# Altium PCB Motherboard.PcbDoc (part 5 of 5)
Units mm, origin at the board's own origin, x right, y up, seen from the top; angles counter-clockwise.
Board outline 133.86 x 67.84 mm, 4 copper layers (Top Layer, Power Plane, Ground Plane, Bottom Layer), stack 1.586 mm thick; 260 components, 155 nets, 877 pads, 1037 vias.
Unrouted connection lines stored in the file: 43.
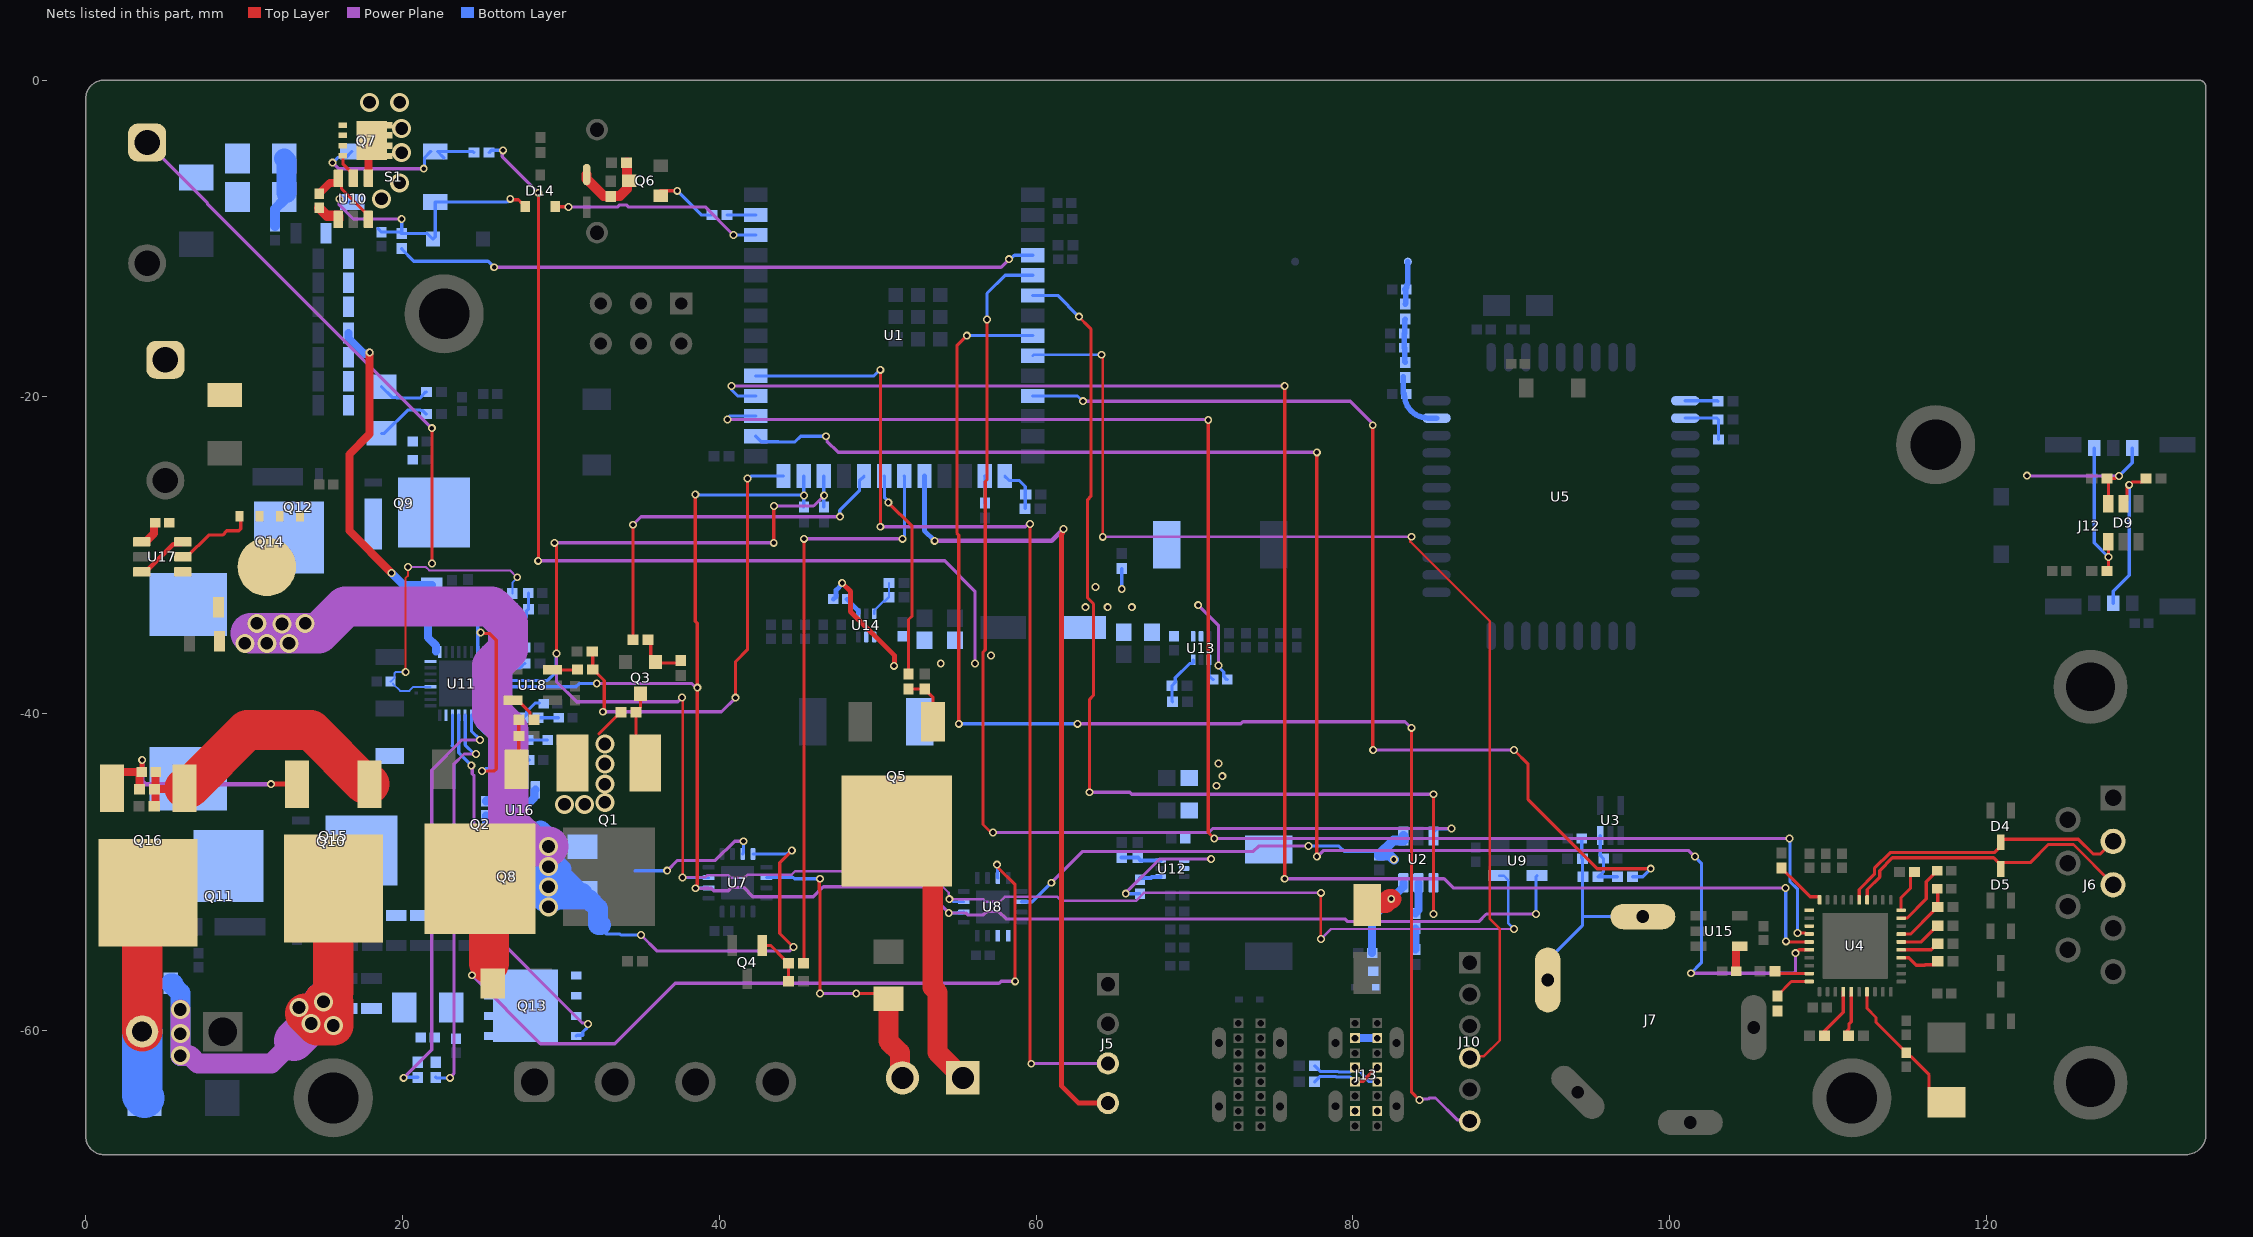
[diagram p5: the nets of this part, all layers, seen from the top]

## Via types
v1: diameter 0.5, hole 0.3, Top Layer to Bottom Layer, tented both sides, 988 vias
v2: diameter 1.2, hole 0.8, Top Layer to Bottom Layer, tented both sides, 29 vias
v3: diameter 0.5, hole 0.2, Top Layer to Bottom Layer, 20 vias

## Nets (pads, with @x,y where several pads share a name; then routed paths per layer and width w, separated by ;. In a path a pad name is that pad's centre, name@x,y a point inside that pad or via, vN(x,y) a via of type N, cw(c..) or ccw(c..) an arc to the next point about the centre after c; other vN are vias at no path point) (continued)
NetC8_2: C8.2 R32.2 U4.7 | length 4.2
  Top Layer w0.203: U4.7@114.613,-53.91 115.218,-53.91 116.68,-52.448 116.68,-52.423 116.903,-52.2 R32.2@116.928,-52.2 116.928,-51.077 C8.2@116.908,-51.057
NetC9_2: C9.2 U4.9 | length 4.2
  Top Layer w0.203: U4.9@114.613,-52.91 114.626,-52.897 114.997,-52.897 116.205,-51.689 116.205,-50.597 116.888,-49.914 C9.2@116.908,-49.914
NetC10_2: C10.2 U4.37 Y1.2 | length 9.2
  Top Layer w0.203: U4.37@112.463,-57.56 112.463,-58.615 113.03,-59.182 113.03,-59.484 114.935,-61.389 C10.2@114.935,-61.409 114.935,-61.429 115.143,-61.637 115.211,-61.637 116.377,-62.803 116.377,-63.686 117.225,-64.534 Y1.2@117.475,-64.534
NetC17_2: C17.2 R39.2 U5.32 | length 4
  Bottom Layer w0.35: R39.2@83.185,-18.73 83.185,-19.753 ccw(c83.244,-19.753) 83.244,-19.812 ccw(c84.77,-19.812) 84.77,-21.338 U5.32@85.279,-21.338
NetC18_2: C18.2 C19.2 R39.1 R40.2 | length 2.8
  Bottom Layer w0.35: R39.1@83.312,-17.813 83.278,-17.779 83.278,-16.925 C18.2@83.244,-16.891 C19.2@83.244,-16.002 83.278,-15.968 83.278,-15.114 R40.2@83.312,-15.08
NetC20_2: C20.2 R40.1 RF_PCB1.1 | length 2.8
  Bottom Layer w0.35: R40.1@83.312,-14.13 83.341,-14.101 83.341,-13.285 83.264,-13.208 83.399,-13.073 83.399,-12.938 83.469,-12.868 RF_PCB1.1@83.469,-11.46
NetC23_2: C23.2 J7.3 J7.5 R44.1 R45.1 | length 13.7
  Bottom Layer w0.203: J7.5@92.306,-56.809 92.306,-55.559 94.489,-53.376 94.489,-52.706 ; C23.2@94.454,-47.879 94.454,-49.114 R45.1@94.489,-49.149 94.489,-52.706 ; J7.3@98.306,-52.809 94.592,-52.809 94.489,-52.706
NetC27_2: C27.2 C28.2 Q9.5-6-7-8 R48.1 R54.2 | length 3.5
  Bottom Layer w0.203: R48.1@18.669,-22.303 18.844,-22.303 20.319,-20.828 21.129,-20.828 21.159,-20.859 21.273,-20.859 R54.2@21.496,-21.082
NetC40_2: C40.2 R50.2 R51.2 | length 4.3
  Bottom Layer w0.635: C40.2@11.938,-9.199 11.938,-8.127 12.524,-7.541 R50.2@12.524,-7.366
  Bottom Layer w1.27: R51.2@12.524,-4.953 12.664,-5.093 R50.2@12.664,-7.125
NetC43_1: C43.1 U10.1 | length 1.6
  Top Layer w0.635: C43.1@14.732,-8.06 14.732,-8.065 14.74,-8.073 14.745,-8.073 15.232,-8.56 15.923,-8.56 15.941,-8.578 U10.1@15.941,-8.793
NetC43_2: C43.2 D11.2 J11.1 Q7.1 Q7.2 Q7.3 R50.1 R51.1 U10.3 U10.6 | length 39.2
  Top Layer w0.203: U10.6@15.941,-6.193 16.139,-6.391 16.139,-6.841 17.841,-8.543 U10.3@17.841,-8.793 ; v1(21.844,-21.971) 21.851,-21.978 21.851,-30.502 v1(21.859,-30.509)
  Top Layer w0.508: C43.2@14.732,-7.18 14.732,-7.16 15.403,-6.489 15.895,-6.489 15.941,-6.443 U10.6@15.941,-6.193
  Power Plane w0.203: J11.1@3.868,-3.937 7.678,-7.747 7.678,-7.805 v1(21.844,-21.971)
NetC56_2: C56.2 C57.2 Q13.5 Q13.6 Q13.7 Q13.8 Q13.9 R59.2 R61.2
NetC57_1: C57.1 C58.1 C59.1 Q15.2 R57.1 R59.1 R62.2 | length 29.8
  Top Layer w2.54: v2@13.843,-58.928 14.605,-59.69 v2(15.621,-59.69) 15.621,-58.225 15.586,-58.19 v2(15.01,-58.19) ; 15.621,-57.578 Q15.2@15.621,-51.041
  Power Plane w1.27: v2(5.969,-58.674) v2(5.969,-60.198) v2(5.969,-61.595) 6.582,-61.595 7.07,-62.083 11.704,-62.083 13.144,-60.642
  Power Plane w2.54: 13.144,-60.642 v2(14.224,-59.563) 15.01,-58.777 v2(15.01,-58.19)
  Bottom Layer w1.27: R57.1@5.36,-57.023 5.505,-57.023 5.545,-57.063 5.545,-57.208 5.969,-57.632 v2(5.969,-58.674) v2(5.969,-60.198) v2(5.969,-61.595)
  other v2: 13.462,-58.547
NetC60_2: C60.2 R66.1 | length 1.2
  Bottom Layer w0.203: R66.1@27.907,-41.656 C60.2@29.151,-41.656
NetC62_2: C62.2 R66.2 U11.17 | length 4
  Bottom Layer w0.203: 25.273,-40.259 25.535,-40.259 26.932,-41.656 26.982,-41.656 27.205,-41.879 27.354,-42.028 27.354,-42.065 27.473,-42.184 27.51,-42.184 27.798,-42.472 27.798,-42.718 28.006,-42.926 C62.2@28.008,-42.926
NetC63_1: C63.1 R68.1 U11.8 | length 5.3
  Bottom Layer w0.203: U11.8@25.149,-36.1 25.149,-35.828 26.289,-34.688 27.034,-34.688 27.81,-33.912 27.81,-33.531 27.942,-33.399 C63.1@27.942,-32.385
NetC65_1: C65.1 R71.1 U11.16 | length 3.8
  Bottom Layer w0.203: U11.16@25.749,-39.5 26.021,-39.5 26.022,-39.502 26.022,-39.689 26.592,-40.259 R71.1@27.592,-40.259 ; R71.1@27.617,-40.259 27.84,-40.036 27.84,-39.859 28.375,-39.324 C65.1@28.621,-39.324
NetC66_1: C66.1 U11.9 | length 2.4
  Bottom Layer w0.203: U11.9@25.749,-36.7 26.435,-36.7 27.113,-36.022 27.546,-36.022 C66.1@27.754,-35.814
NetC67_1: C67.1 R71.2 | length 1.3
  Bottom Layer w0.203: R71.2@28.542,-40.259 C67.1@29.845,-40.259
NetC68_1: C68.1 L2.1 U12.2 | length 7.2
  Power Plane w0.203: v1(65.659,-51.363) 65.659,-51.308 67.795,-49.172 v1(71.049,-49.172)
  Bottom Layer w0.203: v1(65.659,-51.363) 66.544,-51.363 C68.1@66.548,-51.367
NetC68_2: C68.2 U12.4 | length 1.3
  Bottom Layer w0.254: C68.2@66.548,-50.36 67.239,-50.36 67.3,-50.299 67.839,-50.299 U12.4@67.862,-50.276
NetC77_2: C77.2 D14.1 D15.2 R75.2 S1.3 S1.4 | length 19
  Top Layer w0.203: v1(26.797,-7.493) 26.854,-7.55 27.317,-7.55 27.504,-7.737 27.554,-7.737 27.752,-7.935 D14.1@27.752,-7.985
  Power Plane w0.203: v1(16.002,-7.493) 16.002,-7.874 16.891,-8.763 v1(19.939,-8.763)
  Bottom Layer w0.203: v1(16.002,-7.493) 16.17,-7.493 16.253,-7.411 16.538,-7.696 S1.4@16.806,-7.696 S1.4@17.081,-7.696 ; C77.2@18.461,-9.385 C77.2@18.669,-9.593 19.847,-9.593 R75.2@19.939,-9.685 ; v1(19.939,-8.763) R75.2@19.939,-9.685 ; v1(26.797,-7.493) 26.594,-7.696 23.622,-7.696 S1.3@22.056,-7.696 22.056,-9.897 D15.2@21.92,-10.033 21.572,-9.685 R75.2@19.939,-9.685
NetC78_1: C78.1 L3.1 U13.2 | length 5.5
  Power Plane w0.203: v1(70.231,-33.147) 71.519,-34.435 71.519,-36.95 v1(71.51,-36.958)
  Bottom Layer w0.203: v1(71.51,-36.958) 71.51,-37.039 71.84,-37.368 71.84,-37.638 72.048,-37.846 C78.1@72.068,-37.846
NetC78_2: C78.2 U13.4 | length 1.4
  Bottom Layer w0.203: U13.4@70.915,-36.601 70.915,-37.593 71.168,-37.846 C78.2@71.188,-37.846
NetC87_1: C87.1 L4.1 U14.2 | length 7.9
  Top Layer w0.3: v1(47.752,-31.75) 48.279,-32.277 48.279,-33.547 51.054,-36.322 51.054,-36.957 51.049,-36.957 v1(51.027,-36.979)
  Bottom Layer w0.3: C87.1@47.185,-32.766 47.205,-32.766 47.365,-32.606 47.365,-32.191 47.752,-31.804 v1(47.752,-31.75)
NetC87_2: C87.2 U14.4 | length 1.2
  Bottom Layer w0.3: C87.2@48.065,-32.766 48.085,-32.766 48.245,-32.926 48.245,-32.961 48.776,-33.492 U14.4@48.776,-33.677
NetC97_2: C97.2 U15.4 | length 1.8
  Top Layer w0.508: C97.2@104.199,-56.261 104.199,-54.717 104.245,-54.671 U15.4@104.424,-54.671
NetC99_2: C99.2 R44.2 R83.1 U3.3 | length 4.1
  Bottom Layer w0.203: R44.2@95.471,-50.292 R44.2@95.496,-50.292 ; U3.3@95.616,-47.686 95.616,-48.941 95.824,-49.149 C99.2@95.826,-49.149 95.826,-49.962 R44.2@95.496,-50.292 ; R83.1@96.713,-50.292 R44.2@95.496,-50.292
NetC100_1: C100.1 U16.1 | length 1.7
  Bottom Layer w0.508: C100.1@25.273,-45.534 25.273,-45.514 25.329,-45.458 25.825,-45.458 26.186,-45.097 26.436,-45.097 26.482,-45.051 U16.1@26.482,-44.801
NetC103_1: C103.1 U17.1 | length 1.7
  Top Layer w0.508: U17.1@3.526,-29.149 3.776,-29.149 4.31,-28.615 4.31,-27.996 4.366,-27.94 C103.1@4.386,-27.94
NetC103_2: C103.2 D10.2 J8.1 Q14.1 Q14.2 Q14.3 U17.3 U17.6 | length 3.4
  Top Layer w0.305: U17.3@3.526,-31.049 3.776,-31.049 5.528,-29.297 5.978,-29.297 U17.6@6.126,-29.149
NetC106_1: C106.1 Q15.3 Q16.3 R58.1 | length 15.7
  Top Layer w0.305: C106.1@3.51,-43.688 3.543,-43.655 3.543,-42.939 v1(3.556,-42.926) ; v1(11.684,-44.45) 11.693,-44.441 Q15.3@13.335,-44.441
  Top Layer w0.508: Q16.3@1.651,-44.695 1.651,-44.184 2.147,-43.688 3.51,-43.688 3.396,-43.802 R58.1@3.396,-44.761
  Power Plane w0.305: v1(3.556,-42.926) 3.556,-44.271 3.735,-44.45 v1(11.684,-44.45)
NetC106_2: C106.2 Q15.1 Q16.1 R58.2 R63.2 | length 18.7
  Top Layer w0.508: R63.2@4.318,-45.847 4.339,-45.847 4.41,-45.776 R58.2@4.41,-44.761 ; R58.2@4.346,-44.761 R58.2@4.41,-44.761 ; C106.2@4.41,-43.688 R58.2@4.41,-44.761 ; Q16.1@6.223,-44.695 6.157,-44.761 R58.2@4.41,-44.761
  Top Layer w2.54: Q16.1@6.223,-44.695 6.513,-44.695 10.187,-41.021 14.197,-41.021 17.617,-44.441 Q15.1@17.907,-44.441
NetD13_1: D13.1 J9.2 Q16.2 R57.2 | length 16.4
  Top Layer w2.54: J9.2@3.556,-60.071 3.556,-51.676 Q16.2@3.937,-51.295
  Bottom Layer w1.27: J9.2@3.556,-60.071 3.683,-59.944 3.683,-57.063 3.723,-57.023 R57.2@3.81,-57.023
  Bottom Layer w2.54: J9.2@3.556,-60.071 3.556,-64.109 D13.1@3.709,-64.262
NetD14_2: D14.2 U1.38 | length 13.5
  Top Layer w0.203: D14.2@29.652,-7.985 30.464,-7.985 v1(30.48,-8.001)
  Power Plane w0.203: v1(30.48,-8.001) 33.577,-8.001 33.7,-7.878 34.118,-7.878 34.241,-8.001 39.116,-8.001 v1(40.894,-9.779)
  Bottom Layer w0.203: v1(40.894,-9.779) U1.38@42.291,-9.779
NetD16_2: D16.2 Q6.3 R34.2 R35.2 | length 5.2
  Top Layer w0.635: D16.2@31.623,-5.96 31.623,-6.24 32.683,-7.3 33.139,-7.3 R34.2@33.147,-7.308 ; R34.2@33.147,-7.333 R34.2@33.147,-7.308 ; R35.2@34.13,-5.207 34.155,-5.207 34.163,-5.215 34.163,-6.393 34.163,-6.858 33.721,-7.3 33.154,-7.3 R34.2@33.147,-7.308
NetJ5_3: J5.3 U1.31 | length 66.4
  Top Layer w0.203: v1(50.165,-28.194) v1(50.165,-18.288) ; v1(59.619,-28.019) 59.619,-59.69 59.619,-62.032 v1(59.69,-62.103)
  Power Plane w0.203: v1(50.165,-28.194) 59.309,-28.194 59.484,-28.019 v1(59.619,-28.019) ; v1(59.69,-62.103) 59.7,-62.093 64.523,-62.093 J5.3@64.533,-62.083
  Bottom Layer w0.203: U1.31@42.291,-18.669 49.761,-18.669 50.142,-18.288 v1(50.165,-18.288)
NetJ5_4: J5.4 U1.19 | length 51.4
  Top Layer w0.3: v1(61.722,-28.343) 61.684,-28.381 61.684,-28.613 61.595,-28.702 61.595,-63.5 62.678,-64.583 J5.4@64.533,-64.583
  Power Plane w0.3: v1(53.594,-29.083) 60.982,-29.083 v1(61.722,-28.343)
  Bottom Layer w0.3: U1.19@52.946,-24.999 52.946,-28.435 v1(53.594,-29.083)
NetJ10_4: J10.4 U1.9 | length 72
  Top Layer w0.152: v1(64.125,-17.338) 64.201,-17.338 64.262,-17.399 64.204,-17.457 v1(64.204,-28.834) ; v1(83.693,-28.829) 83.629,-28.893 83.629,-29.146 88.646,-34.163 88.646,-52.959 89.281,-53.594 89.281,-60.619 88.28,-61.62 87.478,-61.62 J10.4@87.376,-61.722
  Power Plane w0.152: v1(64.204,-28.834) 64.199,-28.829 v1(83.693,-28.829)
  Bottom Layer w0.152: U1.9@59.791,-17.399 59.852,-17.338 v1(64.125,-17.338)
NetJ10_6: J10.6 U1.8 | length 85.3
  Top Layer w0.203: v1(55.118,-40.64) 55.118,-28.721 54.995,-28.598 54.995,-16.76 v1(55.626,-16.129) ; v1(83.693,-40.894) 83.693,-63.881 v1(84.201,-64.389)
  Power Plane w0.203: v1(62.611,-40.64) 72.927,-40.64 73.054,-40.513 83.289,-40.513 83.67,-40.894 v1(83.693,-40.894) ; v1(84.201,-64.389) 84.258,-64.332 84.745,-64.332 84.815,-64.262 85.217,-64.262 86.614,-65.659 87.313,-65.659 J10.6@87.376,-65.722
  Bottom Layer w0.203: v1(55.118,-40.64) v1(62.611,-40.64) ; v1(55.626,-16.129) U1.8@59.791,-16.129
NetQ1_1: Q1.1 Q3.3 R8.2 | length 4.8
  Top Layer w0.2: Q3.3@35.02,-38.69 35.02,-39.612 34.983,-39.649 34.983,-39.674 34.758,-39.899 R8.2@34.733,-39.899 34.733,-42.521 Q1.1@35.31,-43.098
NetQ2_1: Q2.1 R11.2 R16.1 | length 3.2
  Top Layer w0.2: Q2.1@27.192,-43.519 27.338,-43.373 R11.2@27.338,-41.402 R16.1@27.338,-40.386
NetQ2_4: Q2.4 R46.2 U8.11 | length 58.2
  Top Layer w0.203: v1(24.384,-56.515) 24.776,-56.515 25.449,-55.842 25.449,-55.753 ; Q2.4@24.892,-50.419 Q2.4@28.263,-47.048 ; v1(57.531,-49.53) 57.531,-49.657 58.674,-50.8 v1(58.674,-56.896)
  Top Layer w2.54: Q2.4@24.892,-50.419 25.449,-50.976 25.449,-55.753
  Power Plane w0.203: v1(24.384,-56.515) 28.702,-60.833 33.401,-60.833 37.211,-57.023 57.658,-57.023 57.785,-56.896 v1(58.674,-56.896)
  Bottom Layer w0.203: v1(57.531,-49.53) 57.557,-49.556 57.557,-50.346 U8.11@57.583,-50.372
NetQ3_1: Q3.1 R10.1 R12.2 | length 3.5
  Top Layer w0.2: R10.1@35.495,-35.327 35.67,-35.503 35.67,-36.79 37.4,-36.79 R12.2@37.56,-36.63
NetQ4_1: Q4.1 R14.2 R15.2 | length 3.3
  Top Layer w0.203: Q4.1@42.699,-54.637 43.24,-54.637 44.108,-55.505 44.108,-55.53 44.356,-55.778 R15.2@44.356,-56.896
NetQ5_1: Q5.1 R22.2 R23.2 | length 3.3
  Top Layer w0.203: R22.2@51.943,-38.448 R23.2@52.959,-38.448 52.959,-38.473 53.182,-38.696 53.207,-38.696 53.495,-38.984 Q5.1@53.495,-40.513
NetQ6_1: Q6.1 R47.2 | length 3.9
  Top Layer w0.203: Q6.1@36.256,-7 36.271,-6.985 v1(37.338,-6.985)
  Bottom Layer w0.203: v1(37.338,-6.985) 38.862,-8.509 R47.2@39.53,-8.509
NetQ7_4: Q7.4 U10.5 | length 1.7
  Top Layer w0.203: Q7.4@16.228,-4.785 16.228,-5.28 16.891,-5.943 U10.5@16.891,-6.193
NetQ8_4: Q8.4 U16.5 | length 3.3
  Bottom Layer w0.203: Q8.4@25.114,-49.317 25.214,-49.317 25.814,-48.717 26.366,-48.717 27.432,-47.651 U16.5@27.432,-47.401
NetQ13_4: Q13.4 U11.21 | length 24.3
  Power Plane w0.203: v1(24.341,-43.264) 24.397,-43.32 24.397,-43.806 24.511,-43.92 24.511,-52.705 31.335,-59.529 31.565,-59.529 31.624,-59.588 v1(31.704,-59.588)
  Bottom Layer w0.203: U11.21@23.549,-40.1 23.549,-42.472 v1(24.341,-43.264) ; Q13.4@30.969,-60.346 31.013,-60.302 31.373,-60.302 31.373,-60.094 31.648,-59.819 31.648,-59.645 v1(31.704,-59.588)
NetQ14_4: Q14.4 U17.5 | length 5.2
  Top Layer w0.203: U17.5@6.126,-30.099 6.376,-30.099 7.755,-28.72 8.631,-28.72 8.903,-28.448 9.66,-28.448 9.779,-28.329 9.779,-27.61 Q14.4@9.705,-27.536
NetR3_2: R3.2 R9.1 U1.26 | length 29.4
  Top Layer w0.203: R3.2@31.971,-36.068 32.004,-36.101 R9.1@32.004,-37.211 32.029,-37.211 32.439,-37.621 32.456,-37.621 32.737,-37.902 32.737,-39.7 32.639,-39.798 v1(32.639,-39.878) ; v1(41.021,-38.989) 41.021,-36.703 41.783,-35.941 v1(41.783,-25.146)
  Power Plane w0.203: v1(32.639,-39.878) 40.132,-39.878 v1(41.021,-38.989)
  Bottom Layer w0.203: v1(41.783,-25.146) 41.863,-25.146 42.01,-24.999 U1.26@44.056,-24.999
NetR4_2: R4.2 U1.16 | length 1.7
  Bottom Layer w0.203: U1.16@56.756,-24.999 56.769,-25.012 R4.2@56.769,-26.703
NetR7_1: R7.1 R64.1 U11.18 | length 3.8
  Bottom Layer w0.203: U11.18@24.749,-40.1 24.749,-40.751 25.781,-41.783 R64.1@25.781,-42.324 25.781,-42.349 26.01,-42.578 R7.1@26.797,-42.578
NetR9_2: R9.2 U18.3 | length 1.6
  Top Layer w0.203: U18.3@29.467,-37.239 31.026,-37.239 R9.2@31.054,-37.211
NetR10_2: R10.2 U1.22 | length 23.8
  Top Layer w0.2: v1(34.544,-28.067) 34.545,-28.068 R10.2@34.545,-35.327
  Power Plane w0.2: v1(34.544,-28.067) 35.052,-27.559 v1(47.619,-27.559)
  Bottom Layer w0.2: v1(47.619,-27.559) 47.6,-27.54 47.6,-27.162 48.838,-25.925 48.838,-25.297 U1.22@49.136,-24.999
NetR14_1: R14.1 U1.20 | length 37
  Top Layer w0.203: R14.1@45.306,-55.753 45.339,-55.72 v1(45.339,-28.956)
  Power Plane w0.203: v1(45.339,-28.956) v1(51.562,-28.956)
  Bottom Layer w0.203: v1(51.562,-28.956) 51.562,-28.876 51.689,-28.749 51.689,-25.012 U1.20@51.676,-24.999
NetR16_2: R16.2 U18.5 | length 2
  Top Layer w0.203: U18.5@26.967,-39.139 27.267,-39.139 28.04,-39.912 28.04,-40.163 28.263,-40.386 R16.2@28.288,-40.386
NetR19_2: R19.2 U2.1 U8.14 | length 27.5
  Power Plane w0.203: v1(60.96,-50.673) 62.94,-48.693 73.71,-48.693 74.045,-48.358 v1(77.191,-48.358)
  Bottom Layer w0.203: U8.14@59.083,-51.872 59.761,-51.872 v1(60.96,-50.673) ; v1(77.191,-48.358) 79.124,-48.358 79.446,-48.68 81.438,-48.68 81.661,-48.903 R19.2@81.661,-48.928
  Bottom Layer w0.635: R19.2@81.661,-48.928 81.661,-48.953 81.669,-48.961 82.348,-48.961 v1(82.585,-49.198) ; R19.2@81.661,-48.903 82.558,-48.006 83.177,-48.006 83.185,-47.998 U2.1@83.185,-47.723
NetR20_1: R20.1 R21.2 | length 1.3
  Bottom Layer w0.5: R21.2@83.947,-54.897 R20.1@83.947,-53.561
NetR20_2: R20.2 U2.5 | length 2
  Bottom Layer w0.5: R20.2@83.947,-52.611 83.947,-52.586 84.135,-52.398 U2.5@84.135,-50.673
NetR22_1: R22.1 U1.21 | length 13.3
  Top Layer w0.203: v1(50.669,-26.67) 52.168,-28.169 52.168,-33.829 51.943,-34.054 R22.1@51.943,-37.498
  Bottom Layer w0.2: U1.21@50.406,-24.999 50.419,-25.012 50.419,-26.339 50.669,-26.589 v1(50.669,-26.67)
NetR24_1: R24.1 U4.20 | length 3.3
  Top Layer w0.203: R24.1@107.061,-49.751 108.077,-50.767 108.872,-51.562 109.45,-51.562 109.463,-51.575 U4.20@109.463,-51.76
NetR25_1: R25.1 U4.29 | length 2.2
  Top Layer w0.203: R25.1@106.65,-56.264 106.796,-56.41 U4.29@108.813,-56.41
NetR26_2: R26.2 U4.35 | length 2.7
  Top Layer w0.203: R26.2@111.128,-60.107 111.319,-59.916 111.319,-59.599 111.463,-59.455 U4.35@111.463,-57.56
NetR27_2: R27.2 U4.34 | length 3.1
  Top Layer w0.203: R27.2@109.731,-60.107 109.731,-60.082 110.963,-58.85 U4.34@110.963,-57.56
NetR28_2: R28.2 U4.4 | length 2.6
  Top Layer w0.203: U4.4@114.613,-55.41 115.1,-55.41 115.57,-55.88 116.109,-55.88 116.14,-55.849 116.705,-55.849 R28.2@116.928,-55.626
NetR29_2: R29.2 U4.5 | length 2.5
  Top Layer w0.203: U4.5@114.613,-54.91 116.526,-54.91 116.903,-54.533 R29.2@116.928,-54.533
NetR30_2: R30.2 U4.6 | length 2.7
  Top Layer w0.203: U4.6@114.613,-54.41 115.883,-54.41 116.903,-53.39 R30.2@116.928,-53.39
NetR31_2: R31.2 U4.10 | length 2.8
  Top Layer w0.203: U4.10@114.613,-52.41 114.613,-51.602 115.209,-51.006 115.209,-50.211 115.432,-49.988 R31.2@115.457,-49.988
NetR33_1: R33.1 U4.30 | length 2.4
  Top Layer w0.203: R33.1@106.807,-57.818 106.807,-57.793 107.69,-56.91 U4.30@108.813,-56.91
NetR33_2: R33.2
NetR36_1: R36.1 U5.1 | length 2.1
  Bottom Layer w0.2: U5.1@100.979,-20.238 103.018,-20.238 R36.1@103.059,-20.279
NetR37_2: R37.2 R38.1 U5.2 | length 3.4
  Bottom Layer w0.2: U5.2@100.979,-21.338 102.975,-21.338 R37.2@103.059,-21.422 103.092,-21.455 R38.1@103.092,-22.692
NetR47_1: R47.1 U1.39 | length 1.8
  Bottom Layer w0.203: R47.1@40.48,-8.509 U1.39@42.291,-8.509
NetR60_1: R60.1 U11.1 | length 3
  Bottom Layer w0.508: R60.1@21.844,-33.414 21.786,-33.414 21.59,-33.61 21.59,-35.179 22.098,-35.687 22.098,-36.068
NetR61_1: R61.1 U11.20 | length 25.3
  Power Plane w0.203: v1(22.987,-62.992) 22.987,-62.979 23.241,-62.725 23.241,-43.18 23.876,-42.545 v1(24.638,-42.545)
  Bottom Layer w0.203: R61.1@22.098,-62.959 22.131,-62.992 v1(22.987,-62.992) ; U11.20@23.949,-40.1 23.949,-41.983 24.511,-42.545 v1(24.638,-42.545)
NetR62_1: R62.1 U11.19 | length 26.7
  Power Plane w0.203: v1(20.066,-62.992) 21.844,-61.214 21.844,-43.561 23.749,-41.656 v1(24.892,-41.656)
  Bottom Layer w0.203: v1(20.066,-62.992) 20.099,-62.959 R62.1@20.955,-62.959 ; U11.19@24.349,-40.1 24.349,-41.113 v1(24.892,-41.656)
NetR70_1: R70.1 U11.10 | length 2.1
  Bottom Layer w0.203: U11.10@25.749,-37.1 27.424,-37.1 27.694,-36.83 R70.1@27.719,-36.83
NetR72_2: R72.2 S1.1 S1.2 | length 11.6
  Power Plane w0.203: v1(15.577,-5.206) 15.958,-5.588 v1(21.336,-5.588)
  Bottom Layer w0.203: v1(15.577,-5.206) 15.897,-4.886 16.416,-4.886 S1.2@16.806,-4.496 ; v1(21.336,-5.588) 21.383,-5.541 21.383,-4.894 S1.1@21.781,-4.496 ; S1.1@22.596,-4.894 22.203,-4.501 24.44,-4.501 R72.2@24.511,-4.572
NetR74_1: R74.1 R76.2 U12.6 | length 2.5
  Bottom Layer w0.254: R74.1@65.405,-49.086 R76.2@66.421,-49.086 66.587,-49.253 67.839,-49.253 U12.6@67.862,-49.276
NetR75_1: R75.1 U1.4 | length 40.7
  Power Plane w0.203: v1(25.781,-11.811) 57.785,-11.811 v1(58.293,-11.303)
  Bottom Layer w0.203: R75.1@19.939,-10.635 19.939,-10.66 20.709,-11.43 25.4,-11.43 v1(25.781,-11.811) ; v1(58.293,-11.303) 58.373,-11.303 58.627,-11.049 U1.4@59.791,-11.049
NetR77_1: R77.1 R78.2 U13.6 | length 3.3
  Bottom Layer w0.203: R78.2@68.613,-39.243 68.58,-39.21 R77.1@68.58,-38.227 68.785,-38.022 68.785,-37.732 69.682,-36.834 69.867,-36.834 69.915,-36.786 U13.6@69.915,-36.601
NetR79_1: R79.1 R80.2 U14.6 | length 2.4
  Bottom Layer w0.15: U14.6@49.776,-33.677 49.776,-33.492 50.379,-32.889 50.456,-32.889 R80.2@50.706,-32.639 R79.1@50.706,-31.75
NetR81_1: R81.1 R82.1 U1.15 | length 3
  Bottom Layer w0.203: U1.15@58.026,-24.999 58.3,-25.273 58.928,-25.273 59.309,-25.654 R82.1@59.309,-27.051
NetR83_2: R83.2 U1.11 | length 66.2
  Top Layer w0.203: v1(81.254,-21.789) 81.254,-42.265 v1(81.28,-42.291) ; v1(90.17,-42.291) 91.059,-43.18 91.059,-45.424 95.419,-49.784 v1(98.806,-49.784)
  Power Plane w0.203: v1(62.955,-20.266) 79.829,-20.266 81.28,-21.717 81.28,-21.763 v1(81.254,-21.789) ; v1(81.28,-42.291) v1(90.17,-42.291)
  Bottom Layer w0.203: U1.11@59.791,-19.939 62.611,-19.939 62.992,-20.32 62.992,-20.303 v1(62.955,-20.266) ; R83.2@97.663,-50.292 98.298,-50.292 v1(98.806,-49.784)
NetU1_5: U1.5 U2.3 | length 68.4
  Top Layer w0.203: v1(56.896,-15.113) 56.896,-25.228 56.786,-25.338 56.786,-35.973 56.646,-36.113 56.646,-46.994 57.15,-47.498 v1(57.277,-47.498)
  Power Plane w0.203: v1(57.277,-47.498) 70.915,-47.498 71.169,-47.244 v1(86.233,-47.244)
  Bottom Layer w0.203: v1(56.896,-15.113) 56.896,-13.462 58.039,-12.319 U1.5@59.791,-12.319 ; U2.3@85.085,-47.723 85.085,-47.482 85.308,-47.259 86.218,-47.259 v1(86.233,-47.244)
NetU1_6: U1.6 U2.4 | length 65.7
  Top Layer w0.203: v1(62.701,-14.931) 62.628,-14.859 62.611,-14.859 63.459,-15.707 63.459,-26.27 63.25,-26.479 63.25,-32.692 63.623,-33.065 63.623,-38.846 63.373,-39.096 v1(63.373,-44.958) ; v1(85.09,-52.646) v1(85.09,-45.085)
  Power Plane w0.203: v1(63.373,-44.958) 65.913,-44.958 66.04,-45.085 v1(85.09,-45.085)
  Bottom Layer w0.203: U1.6@59.791,-13.589 61.358,-13.589 v1(62.701,-14.931) ; U2.4@85.085,-50.673 85.087,-50.675 85.087,-52.644 v1(85.09,-52.646)
NetU4_21: U4.21
NetU4_23: U4.23
NetU8_1: U8.1
NetU8_2: U8.2
PHOTOTHERAPY+: J4.2 R17.2 U7.14 | length 20.5
  Top Layer w0.203: v1(46.355,-57.658) 46.355,-51.181 46.312,-51.138 46.312,-50.462 v1(46.355,-50.419) ; v1(48.641,-57.658) 50.341,-57.658 R17.2@50.673,-57.99
  Top Layer w1.27: R17.2@50.673,-57.99 50.673,-60.67 51.403,-61.4 51.403,-62.833 J4.2@51.562,-62.992
  Power Plane w0.203: v1(46.355,-57.658) v1(48.641,-57.658)
  Bottom Layer w0.203: U7.14@42.973,-50.348 44.672,-50.348 44.743,-50.419 v1(46.355,-50.419)
PHOTOTHERAPY-: J4.1 Q5.4 | length 17.3
  Top Layer w1.27: Q5.4@51.195,-47.413 53.471,-49.689 53.471,-57.288 53.78,-57.597 53.78,-61.4 J4.1@55.372,-62.992
REGN: C55.2 R65.2 U11.28 | length 19
  Top Layer w0.127: v1(20.192,-37.36) 20.192,-31.428 20.345,-31.274 v1(20.345,-30.738)
  Power Plane w0.127: v1(20.345,-30.738) 21.465,-30.738 21.677,-30.95 26.779,-30.95 27.214,-31.385 v1(27.237,-31.385)
  Bottom Layer w0.127: C55.2@19.236,-37.973 19.256,-37.973 19.503,-37.727 19.503,-37.435 19.577,-37.36 v1(20.192,-37.36) ; C55.2@19.383,-38.1 19.838,-38.555 20.426,-38.555 20.681,-38.3 U11.28@21.749,-38.3 ; R65.2@26.924,-32.418 26.924,-31.718 27.237,-31.405 v1(27.237,-31.385)
SCL: R5.2 U1.25 U7.6 U8.6 U9.3 U11.13 | length 106.1
  Top Layer w0.203: v1(38.481,-26.162) 38.481,-34.163 38.608,-34.29 v1(38.608,-38.354) 38.608,-50.8 38.481,-50.927 38.481,-51.008 v1(38.494,-51.022)
  Power Plane w0.203: v1(32.258,-38.1) 38.274,-38.1 38.528,-38.354 v1(38.608,-38.354) ; v1(38.494,-51.022) 39.488,-51.022 39.643,-51.177 40.557,-51.177 40.765,-50.969 41.531,-50.969 42.12,-51.558 45.935,-51.558 46.566,-50.927 52.832,-50.927 v1(54.483,-52.578) 55.554,-52.578 55.677,-52.701 56.667,-52.701 56.875,-52.493 57.641,-52.493 58.103,-52.955 79.498,-52.955 79.668,-53.125 87.95,-53.125 88.429,-52.646 v1(91.567,-52.646)
  Bottom Layer w0.203: U11.13@25.749,-38.3 25.751,-38.302 30.942,-38.302 31.144,-38.1 v1(32.258,-38.1) ; v1(38.481,-26.162) 38.51,-26.191 45.315,-26.191 v1(45.345,-26.22) ; v1(38.494,-51.022) 38.506,-51.01 39.311,-51.01 U7.6@39.323,-50.998 ; U1.25@45.326,-24.999 45.326,-26.22 45.326,-26.944 R5.2@45.339,-26.957 ; v1(54.483,-52.578) 55.038,-52.578 55.045,-52.57 55.385,-52.57 U8.6@55.433,-52.522 ; v1(91.567,-52.646) 91.567,-50.283 U9.3@91.624,-50.226
SDA: R6.2 U1.24 U7.7 U8.7 U9.4 U11.12 | length 119.7
  Top Layer w0.152: v1(37.636,-38.974) 37.678,-39.016 v1(37.678,-50.336) ; v1(77.978,-54.229) v1(77.978,-51.308)
  Top Layer w0.203: v1(29.591,-29.21) 29.591,-29.29 29.718,-29.417 v1(29.718,-36.195) ; v1(43.434,-29.21) 43.434,-26.895 v1(43.442,-26.887)
  Power Plane w0.152: v1(37.678,-50.336) 39.088,-50.336 39.23,-50.194 40.546,-50.194 40.703,-50.352 41.593,-50.352 41.779,-50.165 44.564,-50.165 44.788,-49.94 53.115,-49.94 54.483,-51.308 54.483,-51.689 54.501,-51.689 v1(54.522,-51.71) 56.648,-51.71 56.814,-51.876 57.703,-51.876 58.016,-51.562 61.341,-51.562 61.595,-51.816 66.294,-51.816 66.802,-51.308 v1(77.978,-51.308) ; v1(77.978,-54.229) 78.613,-53.594 v1(90.17,-53.594)
  Power Plane w0.203: v1(29.591,-29.21) v1(43.434,-29.21) ; v1(29.718,-36.195) 29.718,-37.973 30.988,-39.243 37.367,-39.243 v1(37.636,-38.974) ; v1(43.442,-26.887) 45.948,-26.887 v1(46.615,-26.22)
  Bottom Layer w0.152: v1(37.678,-50.336) 37.678,-50.333 37.719,-50.292 37.775,-50.348 U7.7@39.323,-50.348 ; v1(54.522,-51.71) 54.616,-51.71 54.778,-51.872 U8.7@55.433,-51.872 ; U9.4@89.224,-50.226 89.524,-50.226 89.798,-50.5 89.798,-53.222 v1(90.17,-53.594)
  Bottom Layer w0.203: U11.12@25.749,-37.9 29.156,-37.9 29.688,-37.368 29.688,-36.225 v1(29.718,-36.195) ; U1.24@46.596,-24.999 46.596,-26.944 R6.2@46.609,-26.957
SIM_CLK: D9.6 J12.S3 R42.1 | length 10.5
  Top Layer w0.203: D9.6@127.701,-26.74 127.701,-25.245 R42.1@127.602,-25.146 128.143,-25.146 128.291,-24.998 v1(128.366,-24.998)
  Power Plane w0.203: v1(122.557,-24.97) 122.555,-24.972 122.555,-25.019 122.576,-24.998 v1(128.366,-24.998)
  Bottom Layer w0.203: v1(128.366,-24.998) 129.212,-24.152 J12.S3@129.212,-23.221
SIM_DATA: D9.1 J12.S6 R41.1 | length 9.1
  Top Layer w0.203: R41.1@127.602,-30.988 127.701,-30.889 v1(127.701,-30.104) D9.1@127.701,-29.14
  Bottom Layer w0.203: J12.S6@126.812,-23.221 126.812,-29.215 v1(127.701,-30.104)
SIM_RST: D9.5 J12.S2 R43.1 | length 10.5
  Top Layer w0.203: D9.5@128.651,-26.74 128.874,-26.517 128.874,-25.685 v1(129.013,-25.546) 129.19,-25.369 129.858,-25.369 R43.1@130.081,-25.146
  Bottom Layer w0.203: J12.S2@128.012,-33.021 128.012,-32.262 129.013,-31.261 v1(129.013,-25.546)
SPI_MISO: U1.30 U4.25 | length 104.7
  Top Layer w0.203: v1(75.692,-50.419) v1(75.692,-19.304) ; v1(107.339,-54.37) 107.379,-54.41 U4.25@108.813,-54.41
  Power Plane w0.203: v1(40.767,-19.304) v1(75.692,-19.304) ; v1(75.692,-50.419) 85.756,-50.419 86.337,-50.999 v1(107.315,-50.999)
  Bottom Layer w0.203: v1(40.767,-19.304) 40.767,-19.558 41.148,-19.939 U1.30@42.291,-19.939 ; v1(107.315,-50.999) 107.327,-51.011 107.327,-54.358 v1(107.339,-54.37)
SPI_MOSI: U1.28 U4.26 | length 102.6
  Top Layer w0.203: v1(77.724,-49.022) v1(77.724,-23.495) ; v1(107.95,-55.118) 108.158,-54.91 U4.26@108.813,-54.91
  Power Plane w0.203: v1(46.736,-22.479) 46.793,-22.536 46.793,-22.79 47.498,-23.495 v1(77.724,-23.495) ; v1(77.724,-49.022) 77.737,-49.022 78.118,-48.641 101.206,-48.641 101.587,-49.022 v1(101.6,-49.022) ; v1(101.346,-56.388) 107.831,-56.388 107.95,-56.269 v1(107.95,-55.118)
  Bottom Layer w0.203: U1.28@42.291,-22.479 42.639,-22.827 43.732,-22.827 43.749,-22.844 44.769,-22.844 45.134,-22.479 v1(46.736,-22.479) ; v1(101.346,-56.388) 102.007,-55.727 102.007,-49.442 101.6,-49.035 v1(101.6,-49.022)
SPI_SCK: U1.29 U4.24 | length 102.3
  Top Layer w0.203: v1(70.866,-21.463) 70.866,-47.498 v1(71.247,-47.879) ; v1(108.077,-53.848) 108.566,-53.848 108.628,-53.91 U4.24@108.813,-53.91
  Power Plane w0.203: v1(40.516,-21.43) 70.833,-21.43 v1(70.866,-21.463) ; v1(71.247,-47.879) v1(107.569,-47.879)
  Bottom Layer w0.203: v1(40.516,-21.43) 40.419,-21.43 40.64,-21.209 U1.29@42.291,-21.209 ; v1(107.569,-47.879) 107.598,-47.908 107.598,-50.606 108.077,-51.084 v1(108.077,-53.848)
SW1: C38.1 L1.1 Q9.1-2-3 Q12.5-6-7-8 U11.32
SW2: C39.1 L1.2 Q10.1-2-3 Q11.5-6-7-8 U11.23
TX_N: D5.3 J6.3 U4.14 | length 19.3
  Top Layer w0.203: U4.14@112.463,-51.76 112.476,-51.747 112.476,-51.1 113.259,-50.317 113.259,-49.903 114.063,-49.098 120.452,-49.098 D5.3@120.904,-49.55 ; D5.3@120.904,-49.8 D5.3@120.904,-49.55 ; J6.3@127.993,-50.8 127.993,-50.757 125.497,-48.26 123.903,-48.26 122.762,-49.402 121.052,-49.402 D5.3@120.904,-49.55
TX_P: D4.3 J6.2 U4.15 | length 19.1
  Top Layer w0.203: U4.15@111.963,-51.76 111.976,-51.747 111.976,-51.1 112.928,-50.148 112.928,-49.766 113.927,-48.768 120.503,-48.768 120.904,-48.367 D4.3@120.904,-48.117 120.904,-48.07 121.052,-47.922 125.811,-47.922 126.746,-48.857 127.193,-48.857 J6.2@127.993,-48.057
USB_N: J13.A7 J13.B7 R56.1 | length 4.7
  Top Layer w0.194: J13.B7@80.134,-63.235 80.634,-63.235 80.883,-62.986 80.883,-62.949 81.284,-62.548 81.321,-62.548 J13.A7@81.534,-62.335
  Bottom Layer w0.194: R56.1@77.564,-63.246 77.589,-63.246 77.817,-63.018 77.817,-63.012 77.931,-62.899 78.906,-62.899 78.952,-62.946 79.845,-62.946 J13.B7@80.134,-63.235
USB_P: J13.A6 J13.B6 R55.1 | length 4.7
  Bottom Layer w0.194: R55.1@77.564,-62.23 77.589,-62.23 77.817,-62.458 77.817,-62.464 77.931,-62.577 79.039,-62.577 79.085,-62.624 79.845,-62.624 J13.B6@80.134,-62.335 80.347,-62.548 80.384,-62.548 80.785,-62.949 80.785,-62.986 81.034,-63.235 J13.A6@81.534,-63.235
V_DDA: C61.2 R64.2 R65.1 R67.1 U11.7 | length 16.1
  Top Layer w0.203: v1(24.93,-34.875) 24.986,-34.932 25.479,-34.932 25.908,-35.361 25.908,-43.495 25.789,-43.614 v1(25.008,-43.614)
  Bottom Layer w0.127: R67.1@25.019,-33.368 R65.1@26.924,-33.368
  Bottom Layer w0.203: U11.7@24.749,-36.1 v1@24.749,-34.875 ; 24.749,-34.417 v1@24.749,-34.875 ; 24.749,-34.382 24.749,-33.663 25.019,-33.393 R67.1@25.019,-33.368 ; v1(24.93,-34.875) v1@24.749,-34.875 ; v1(25.008,-43.614) 25.089,-43.614 25.234,-43.469 25.586,-43.469 R64.2@25.781,-43.274
V_IN_PROTECTED: C30.1 C31.1 C32.1 C33.1 C44.1 C45.1 C46.1 C47.1 Q7.5 Q7.6 Q7.7 Q7.8 Q7.9 R48.2 R53.2 R60.2 U10.4 | length 26.3
  Top Layer w0.508: U10.4@17.841,-6.193 17.841,-4.007 Q7.5@18.038,-3.81 ; v1(17.917,-17.196) 17.917,-22.342 16.637,-23.622 16.637,-28.448 v1(19.304,-31.115)
  Bottom Layer w0.203: R48.2@18.669,-19.353 19.342,-20.026 19.597,-20.026 19.636,-20.066 21.115,-20.066 21.248,-19.933 21.248,-19.908 21.471,-19.685 R53.2@21.496,-19.685
  Bottom Layer w0.508: C45.1@16.571,-15.965 16.571,-16.265 17.578,-17.272 17.907,-17.272 17.907,-17.206 v1(17.917,-17.196) ; v1(19.304,-31.115) 20.053,-31.864 R60.2@21.844,-31.864
  other v2: 18.666,-7.493 19.812,-6.477 19.939,-4.572 19.939,-3.048 17.907,-1.397 19.812,-1.397
V_OUT: C29.2 C34.1 C35.1 C36.1 C37.1 C48.1 C49.1 C50.1 C51.1 C100.2 Q8.1 Q8.2 Q8.3 Q10.5-6-7-8 Q13.1 Q13.2 Q13.3 U11.22 U16.3 U16.6 | length 8
  Bottom Layer w0.2: 23.114,-42.037 23.149,-42.002 U11.22@23.149,-40.1
  Bottom Layer w0.508: 25.273,-47.498 C100.2@25.273,-46.414 ; 25.527,-48.26 25.873,-48.26 26.482,-47.651 U16.6@26.482,-47.401 26.528,-47.355 26.528,-47.105 26.776,-46.857 26.776,-46.734 27.015,-46.495 27.138,-46.495 28.336,-45.297 28.336,-44.847 U16.3@28.382,-44.801
V_SYS: C74.2 C75.2 C76.2 C84.2 C85.2 C86.2 C93.2 C94.2 C95.2 C107.1 Q1.3 R8.1 R18.1 R49.1 R72.1 U7.11 U12.1 U13.1 U14.1 | length 72.4
  Top Layer w0.2: 32.407,-41.278 32.407,-41.25 33.758,-39.899 R8.1@33.783,-39.899
  Top Layer w0.203: v1@28.575,-30.353 v1(28.575,-7.112)
  Power Plane w0.2: v1(36.703,-49.911) 37.353,-49.261 39.751,-49.261 40.959,-48.053 v1(41.529,-48.053) ; 54.229,-30.353 56.134,-32.258 v1(56.134,-36.83)
  Power Plane w0.203: v1@26.289,-4.445 26.289,-4.826 v1(28.575,-7.112) ; v1(28.56,-30.348) 54.224,-30.348 54.229,-30.353
  Bottom Layer w0.2: 34.671,-49.911 v1(36.703,-49.911) ; U7.11@41.473,-48.848 41.523,-48.798 41.523,-48.473 41.529,-48.467 v1(41.529,-48.053) ; v1(65.405,-32.131) R18.1@65.405,-30.828
  Bottom Layer w0.203: R72.1@25.461,-4.572 25.603,-4.43 v1(26.341,-4.43)
  other v1: 71.394,-44.546 71.755,-43.942 71.521,-43.149 53.975,-36.83 57.15,-36.322 63.119,-33.274 64.516,-33.274 66.04,-33.274 63.754,-32.004
  other v2: 30.226,-45.72 31.496,-45.72 32.766,-45.593 32.766,-44.45 32.766,-43.18 32.766,-41.91
Vsense+: C101.1 C102.1 Q8.5 Q8.6 Q8.7 Q8.8 Q8.9 Q14.5-6-7-8 R49.2 U7.12 U16.4 U17.4 | length 72.8
  Top Layer w0.2: v1(44.577,-48.641) 43.815,-49.403 43.815,-53.874 v1(44.678,-54.737)
  Power Plane w0.2: v1(35.052,-53.975) 36.068,-54.991 44.411,-54.991 44.665,-54.737 v1(44.678,-54.737)
  Power Plane w2.54: 10.414,-34.925 14.689,-34.925 16.385,-33.228 25.612,-33.228 26.655,-34.272 26.655,-35.956 25.654,-36.957 25.654,-40.005 26.67,-41.021 26.67,-46.891 26.655,-46.905 28.137,-48.387 v2(29.21,-48.387)
  Bottom Layer w0.2: 32.525,-53.34 32.525,-53.565 32.875,-53.915 33.722,-53.915 33.782,-53.975 v1(35.052,-53.975) ; U7.12@42.123,-48.848 44.289,-48.848 44.496,-48.641 v1(44.577,-48.641)
  Bottom Layer w0.635: U16.4@28.382,-47.401 28.4,-47.419 28.4,-48.295 28.492,-48.387
  Bottom Layer w1.27: Q8.5@26.924,-50.292 26.924,-50.032 28.492,-48.464 28.492,-48.387 ; 28.702,-47.371 28.716,-47.371 29.21,-47.865 v2(29.21,-48.387) 29.21,-48.995 ; v2@29.21,-51.303 29.643,-51.736 R49.2@31.369,-51.736 ; v2(29.21,-49.657) 29.21,-48.995 ; R49.2@31.369,-51.337 31.194,-51.337 30.034,-50.177 30.034,-49.819 29.21,-48.995 ; R49.2@31.781,-51.736 32.34,-52.295 32.34,-53.3 32.38,-53.34 32.525,-53.34
  Bottom Layer w2.54: Q8.5@26.924,-50.292 28.575,-50.292 ; v2@28.807,-50.524 v2(29.21,-50.927) v2@29.21,-51.303
  other v2: 29.21,-52.197 10.033,-35.56 11.43,-35.56 12.827,-35.56 12.389,-34.331 10.795,-34.29 13.843,-34.29
VUSB: C4.2 C5.2 D1.2 D2.1 J13.A4 J13.A9 J13.B4 J13.B9 U2.6 | length 7.8
  Top Layer w1.27: D2.1@81.407,-51.934 82.072,-51.934 82.317,-51.689 v1(82.423,-51.689)
  Bottom Layer w0.5: J13.B4@80.134,-60.485 J13.A9@81.534,-60.485 ; C5.2@81.212,-55.118 81.212,-52.921 83.185,-50.948 U2.6@83.185,-50.673
pads on no net: D9.3 J6.1 J6.4 J6.6 J6.8 J7.4 J10.2 J10.5 J12.1 J12.2 J12.S5 J13.A2 J13.A5 J13.A8 J13.A10 J13.B2 J13.B5 J13.B8 J13.B10 J14.A2 J14.A5 J14.A8 J14.A10 J14.B2 J14.B5 J14.B8 J14.B10 R26.1 R27.1 R29.1 R30.1 R31.1 R32.1 U1.32 U1.33 U1.34 U1.35 U3.2 U3.4 U3.5 U5.3 U5.4 U5.5 U5.6 U5.7 U5.9 U5.10 U5.11 U5.12 U5.14 U5.20 U5.22 U5.24 U5.25 U5.26 U5.28 U5.29 U5.38 U5.40 U5.41 U5.42 U7.8 U7.9 U7.10 U7.13 U7.16 U7.17@40.578,-50.103 U7.17@40.578,-51.243 U7.17@41.718,-50.103 U7.17@41.718,-51.243 U8.8 U8.9 U8.10 U8.13 U8.16 U8.17@56.689,-51.627 U8.17@56.689,-52.766 U8.17@57.828,-51.627 U8.17@57.828,-52.766 U11.4 U11.11 U11.15

## Polygon pours and split planes (outlines as drawn)
DGND on Top Layer "DGND_L01_P152" (solid, remove dead copper, pour order 152): -1.143,1.397 134.62,1.397 135.763,0.254 135.763,-67.31 132.588,-70.485 0.635,-70.485 -1.524,-68.326
4V@2A on Top Layer "4V@2A_L01_P149" (solid, pour order 149): 91.059,-17.78 91.059,-20.32 89.218,-20.32 89.218,-18.098 89.535,-17.78
Vsense+ on Top Layer "VSENSE+_L01_P102" (solid, remove dead copper, pour order 102): 14.556,-28.636 14.556,-35.355 13.335,-36.576 7.811,-36.576 7.493,-36.258 7.493,-32.258 7.239,-32.004 5.461,-32.004 5.08,-31.623 5.08,-31.013 5.391,-30.702 6.527,-30.702 6.881,-30.348 6.881,-29.924 7.851,-28.953 8.727,-28.953 9,-28.681
NetC103_2 on Top Layer "NETC103_2_L01_P103" (solid, remove dead copper, pour order 103): 10.037,-25.273 14.478,-25.273 14.478,-28.448 9.281,-28.448 7.112,-29.083 6.731,-29.464 4.963,-29.464 4.572,-29.073 4.572,-26.543 4.064,-26.543 3.175,-25.654 3.175,-15.875 10.033,-15.875
V_IN_PROTECTED on Top Layer "V_IN_PROTECTED_L01_P123" (solid, remove dead copper, pour order 123): 20.701,-8.382 18.161,-8.382 17.145,-7.112 17.145,-0.889 20.701,-0.889
NetC43_2 on Top Layer "NETC43_2_L01_P110" (solid, remove dead copper, pour order 110): 16.873,-7.493 6.35,-7.493 -1.016,-7.493 -1.016,-0.508 -0.127,0.381 0,0.254 16.873,0.254
V_SYS on Top Layer "V_SYS_L01_P147" (solid, remove dead copper, pour order 147): 29.718,-41.021 33.528,-41.021 33.528,-46.228 29.718,-46.228
DGND on Bottom Layer "DGND_L04_P150" (solid, remove dead copper, pour order 150): -1.143,1.397 134.62,1.397 135.763,0.254 135.763,-67.31 132.588,-70.485 0.635,-70.485 -1.524,-68.326
V_SYS on Bottom Layer "V_SYS_L04_P133" (solid, pour order 133): 49.657,-34.671 49.53,-34.798 49.53,-35.687 49.784,-35.941 51.689,-35.941 52.832,-37.084 57.912,-37.084 57.912,-34.671
V_SYS on Bottom Layer "V_SYS_L04_P130" (solid, pour order 130): 62.357,-33.909 63.881,-35.433 70.104,-35.433 70.104,-34.925 68.707,-33.528 66.675,-31.496 62.357,-31.496
V_OUT on Bottom Layer "V_OUT_L04_P118" (solid, pour order 118): 14.795,-46.038 22.987,-41.529 22.987,-39.624 23.368,-39.624 23.368,-42.418 23.368,-45.432 32.258,-51.084 32.258,-59.182 30.099,-59.182 30.099,-57.13 25.628,-53.692 12.925,-53.692 12.573,-53.34 12.573,-52.451 13.335,-51.689 13.843,-51.689 14.732,-50.8
SW2 on Bottom Layer "SW2_L04_P117" (solid, pour order 117): 9.779,-51.054 7.239,-51.054 2.413,-46.228 2.413,-41.275 3.429,-40.259 15.748,-40.259 16.256,-40.767 22.479,-40.767 22.479,-39.624 22.987,-39.624 22.987,-41.282 20.814,-45.971 14.795,-46.038 14.795,-51.054
V_OUT on Bottom Layer "V_OUT_L04_P108" (solid, pour order 108): 32.258,-53.961 31.355,-53.961 31.115,-53.721 31.115,-52.197 30.988,-52.07 29.972,-52.07 29.464,-51.562 27.432,-51.562 27.432,-48.885 27.464,-48.917 30.022,-48.917 30.226,-49.121 30.226,-50.292 30.43,-50.496 32.519,-50.496 32.519,-53.841 32.512,-53.848
4V@2A on Bottom Layer "4V@2A_L04_P135" (solid, pour order 135): 90.424,-16.51 90.424,-19.431 89.027,-19.431 89.027,-18.669 88.265,-17.907 88.265,-16.51
V_SYS on Bottom Layer "V_SYS_L04_P122" (solid, pour order 122): 30.226,-50.292 30.226,-42.799 32.258,-40.767 33.655,-40.767 35.306,-44.704 35.306,-50.292
5V@2A on Bottom Layer "5V@2A_L04_P141" (solid, remove dead copper, pour order 141): 68.961,-50.8 75.311,-50.8 76.327,-51.816 76.327,-56.896 68.961,-56.896
VUSB on Bottom Layer "VUSB_L04_P144" (solid, remove dead copper, pour order 144): 81.788,-52.705 82.042,-52.959 82.042,-60.706 81.788,-60.96 79.756,-60.96 79.502,-60.706 79.502,-59.182 80.899,-57.785 80.899,-52.705
SW1 on Bottom Layer "SW1_L04_P116" (solid, pour order 116): 9.779,-26.162 8.763,-27.178 8.763,-28.448 7.874,-29.337 4.064,-29.337 2.413,-30.988 2.413,-35.941 3.429,-36.957 15.748,-36.957 17.78,-35.56 20.193,-35.56 21.209,-36.83 22.098,-36.83 22.098,-36.449 20.574,-31.242 19.177,-29.845 19.177,-26.162
V_IN_PROTECTED on Bottom Layer "V_IN_PROTECTED_L04_P114" (solid, remove dead copper, pour order 114): 20.741,-8.082 17.907,-9.398 17.907,-17.272 19.05,-18.415 19.05,-20.701 18.669,-21.082 15.494,-21.082 15.494,-10.795 13.716,-9.017 13.716,0 20.839,0
NetC43_2 on Bottom Layer "NETC43_2_L04_P112" (solid, remove dead copper, pour order 112): 11.43,-8.382 11.43,-4.103 13.716,-4.07 13.716,0.254 -0.254,0.254 -0.762,-0.254 -0.762,-8.382
3v3_dig@2A on Bottom Layer "3V3_DIG@2A_L04_P138" (solid, remove dead copper, pour order 138): 48.26,-34.925 39.243,-34.925 39.116,-35.052 39.116,-35.687 43.561,-40.132 43.561,-41.402 44.196,-42.037 46.736,-42.037 48.26,-40.513
NetC57_1 on Bottom Layer "NETC57_1_L04_P120" (solid, pour order 120): 12.954,-57.531 21.209,-57.531 21.463,-57.785 21.463,-62.23 21.209,-62.484 18.796,-62.484 17.018,-60.706 12.954,-60.706
DGND on Bottom Layer "DGND_L04_P148" (solid, pour order 148): 15.367,-37.465 3.048,-37.465 2.54,-37.973 2.54,-39.37 2.921,-39.751 15.367,-39.751
NetC56_2 on Bottom Layer "NETC56_2_L04_P121" (solid, pour order 121): 29.337,-60.96 24.003,-60.96 22.86,-60.96 22.733,-61.087 22.733,-62.23 22.479,-62.484 21.59,-62.484 21.59,-56.388 29.337,-56.388
NetC27_2 on Bottom Layer "NETC27_2_L04_P115" (solid, pour order 115): 19.685,-21.082 21.082,-22.479 21.082,-24.257 21.844,-25.019 24.384,-25.019 24.384,-29.591 24.257,-29.718 19.685,-29.718 19.558,-29.591 19.558,-25.654 18.034,-24.13 17.399,-23.495 17.399,-21.082
NetC78_1 on Bottom Layer "NETC78_1_L04_P131" (solid, pour order 131): 70.231,-35.56 70.231,-34.417 67.183,-31.369 67.183,-27.432 67.818,-26.797 70.485,-26.797 70.612,-26.924 70.612,-34.671 70.612,-35.56
NetC87_1 on Bottom Layer "NETC87_1_L04_P137" (solid, remove dead copper, pour order 137): 49.403,-34.671 49.403,-35.941 49.784,-36.322 51.562,-36.322 53.467,-38.227 53.467,-42.037 53.34,-42.164 50.038,-42.164 49.149,-41.275 49.149,-34.671
NetC68_1 on Bottom Layer "NETC68_1_L04_P140" (solid, remove dead copper, pour order 140): 70.231,-49.53 72.136,-47.625 76.327,-47.625 76.327,-49.53 75.819,-50.038 68.961,-50.038 68.961,-49.53
V_SYS on Bottom Layer "V_SYS_L04_P139" (solid, pour order 139): 68.961,-49.403 68.961,-43.053 69.342,-42.672 71.374,-42.672 72.263,-43.561 72.263,-45.974 70.866,-47.371 70.866,-48.641 70.104,-49.403
4V@2A on Bottom Layer "4V@2A_L04_P132" (solid, pour order 132): 71.628,-35.306 71.628,-29.083 73.914,-26.797 75.819,-26.797 77.089,-28.067 77.089,-35.306
DGND on Power Plane "DGND_L02_P151" (solid, remove dead copper, pour order 151): -1.143,1.397 134.62,1.397 135.763,0.254 135.763,-67.31 132.588,-70.485 0.635,-70.485 -1.524,-68.326
VUSB on Power Plane "VUSB_L02_P146" (solid, pour order 146): 82.804,-67.056 82.55,-67.31 79.756,-67.31 79.502,-67.056 79.502,-59.563 82.804,-59.563
V_OUT on Power Plane "V_OUT_L02_P128" (solid, pour order 128): 28.194,-46.863 30.48,-46.863 30.607,-46.99 30.607,-53.34 29.972,-53.975 28.067,-53.975
V_SYS on Power Plane "V_SYS_L02_P136" (solid, pour order 136): 59.563,-34.417 61.74,-31.369 69.193,-31.369 60.538,-42.388 72.263,-42.418 72.263,-44.768 58.801,-44.768 57.643,-46.355 29.083,-46.355 29.083,-43.307 31.877,-40.513 33.655,-40.513 48.895,-40.513 54.949,-34.459
5V@2A on Power Plane "5V@2A_L02_P145" (solid, remove dead copper, pour order 145): 76.581,-57.023 71.374,-51.816 69.596,-51.816 68.961,-52.451 68.961,-66.548 76.581,-66.548
4V@2A on Power Plane "4V@2A_L02_P143" (solid, pour order 143): 74.041,-33.782 85.344,-33.782 92.075,-27.051 92.075,-18.161 91.44,-17.526 90.043,-17.526 89.027,-18.542 89.027,-25.146 83.439,-30.734 74.041,-30.734
DGND on Ground Plane "DGND_L03_P134" (solid, remove dead copper, pour order 134): -1.143,1.397 134.62,1.397 135.763,0.254 135.763,-67.31 132.588,-70.485 0.635,-70.485 -1.524,-68.326

## Keep-outs
Keep-Out Layer:
  lines w0.254: 1.143,0 ccw(c1.143,0) 1.143,0 ; 1.143,0 ccw(c1.143,-1.143) 0,-1.143 0,-60.476 0,-66.699 ccw(c1.143,-66.699) 1.143,-67.842 132.588,-67.842 ccw(c132.588,-66.572) 133.858,-66.572 133.858,-0.434 ccw(c133.424,-0.434) 133.424,0 1.143,0

## Other copper
Top Layer:
  pour cut-out: 133.873,0.738 133.873,-12.319 63.76,-12.319 63.746,-6.223 39.751,-6.223 34.671,1.031
Power Plane:
  pour cut-out: 133.873,0.738 133.873,-12.319 63.761,-12.319 63.746,-6.223 39.751,-6.223 34.671,1.031
Ground Plane:
  pour cut-out: 133.873,0.738 133.873,-12.319 63.761,-12.319 63.746,-6.223 39.751,-6.223 34.671,1.031
Bottom Layer:
  pour cut-out: 67.945,-69.088 67.945,-56.642 65.405,-54.102 32.258,-54.102 32.257,-51.815 23.368,-45.974 23.574,-32.258 23.826,-32.258 23.622,-45.72 32.519,-51.554 32.512,-53.848 65.659,-53.848 68.326,-56.515 68.326,-68.707
  pour cut-out: 133.873,0.738 133.873,-12.349 63.761,-12.349 63.747,-6.223 39.751,-6.223 34.671,1.031

## Silkscreen, mask and mechanical layers (free items; w line width, h text height)
Top Overlay:
  circle w0.254: c111.506,-64.262 r3.5
  circle w0.254: c116.793,-23.011 r3.5
  circle w0.254: c15.621,-64.262 r3.5
  circle w0.254: c3.683,-56.134 r0.284
  circle w0.254: c7.62,-66.675 r0.284
  circle w0.254: c8.763,-12.7 r0.284
  circle w0.254: c22.621,-14.756 r3.5
  text "PWR_IN" at 12.065,-17.145 h4 r90
  text "IncuNest" at 98.044,-19.431 h10.16
  text "18.A" at 98.044,-25.781 h8.89
  text "HEATER" at 24.13,-40.386 h4 r90
  text "FAN AUX" at 45.085,-52.07 h4 r90
  text "FAN" at 65.151,-52.324 h4 r90
  text "DISPLAY" at 88.646,-52.451 h4 r90
  text "BATTERY" at 10.795,-53.467 h4 r90
  text "AIR SENSOR" at 75.311,-55.372 h4 r90
  text "LED" at 55.372,-58.547 h4 r90
Bottom Overlay:
  circle w0.254: c2.794,-12.7 r0.284
  text "PROG" at 35.837,-12.432 h1.07
  text "JTAG" at 32.004,-24.257 h1.07 r90

## Text inside footprints (layer, text, board x,y; h text height)
BUZ1: Mechanical 15 "+" at 31.13,-9.041 h2.76 r90